# Altium PCB PowerB.PcbDoc
Units mm, origin at the board's own origin, x right, y up, seen from the top; angles counter-clockwise.
Board outline 84.7 x 77.5 mm, 4 copper layers (Top Layer, Internal Plane 1, Internal Plane 2, Bottom Layer); 23 components, 16 nets, 87 pads, 1 vias.
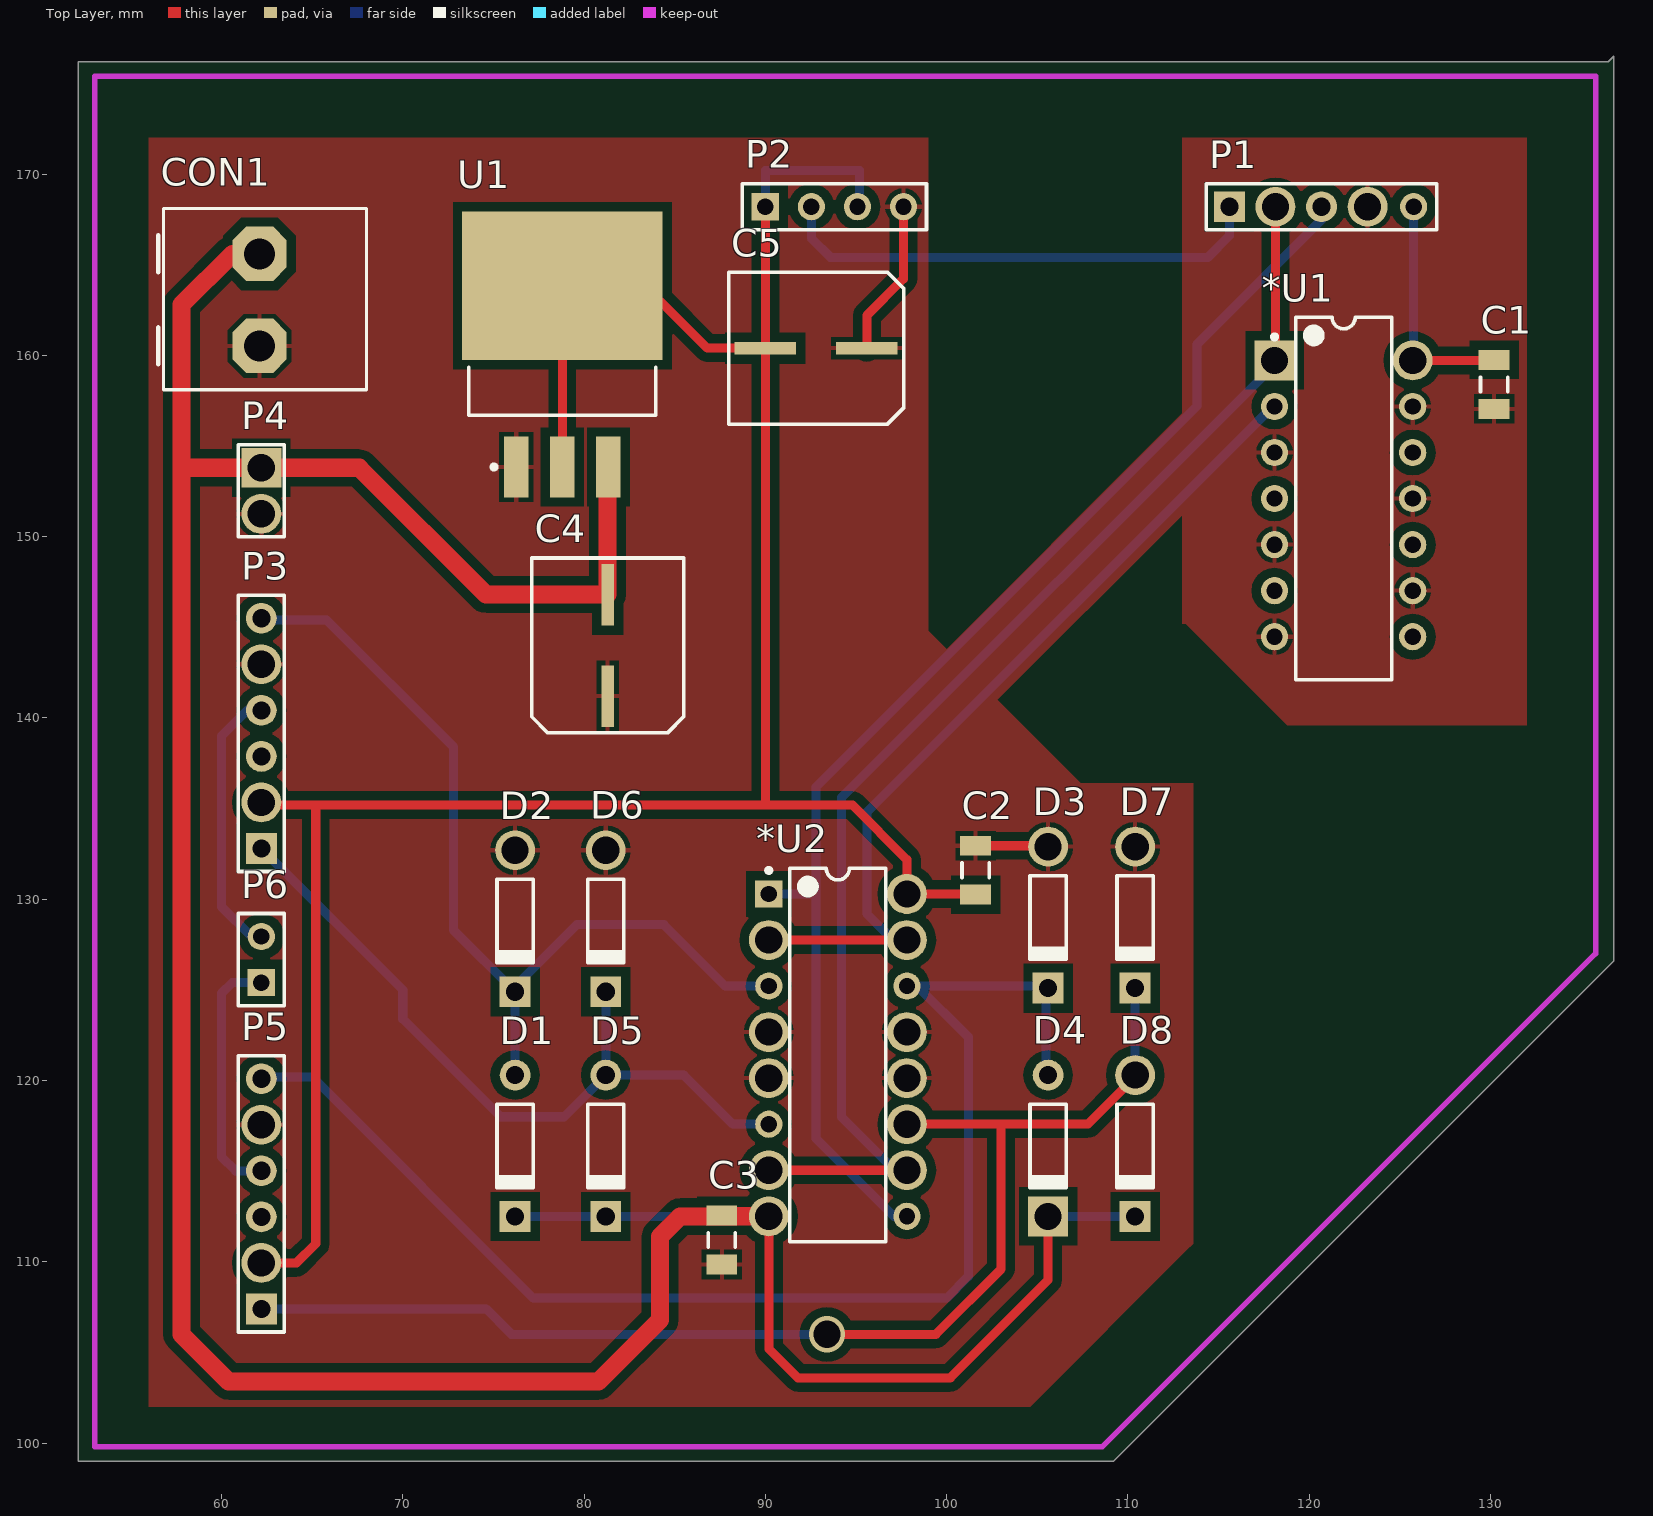
[diagram p0: Top Layer view]
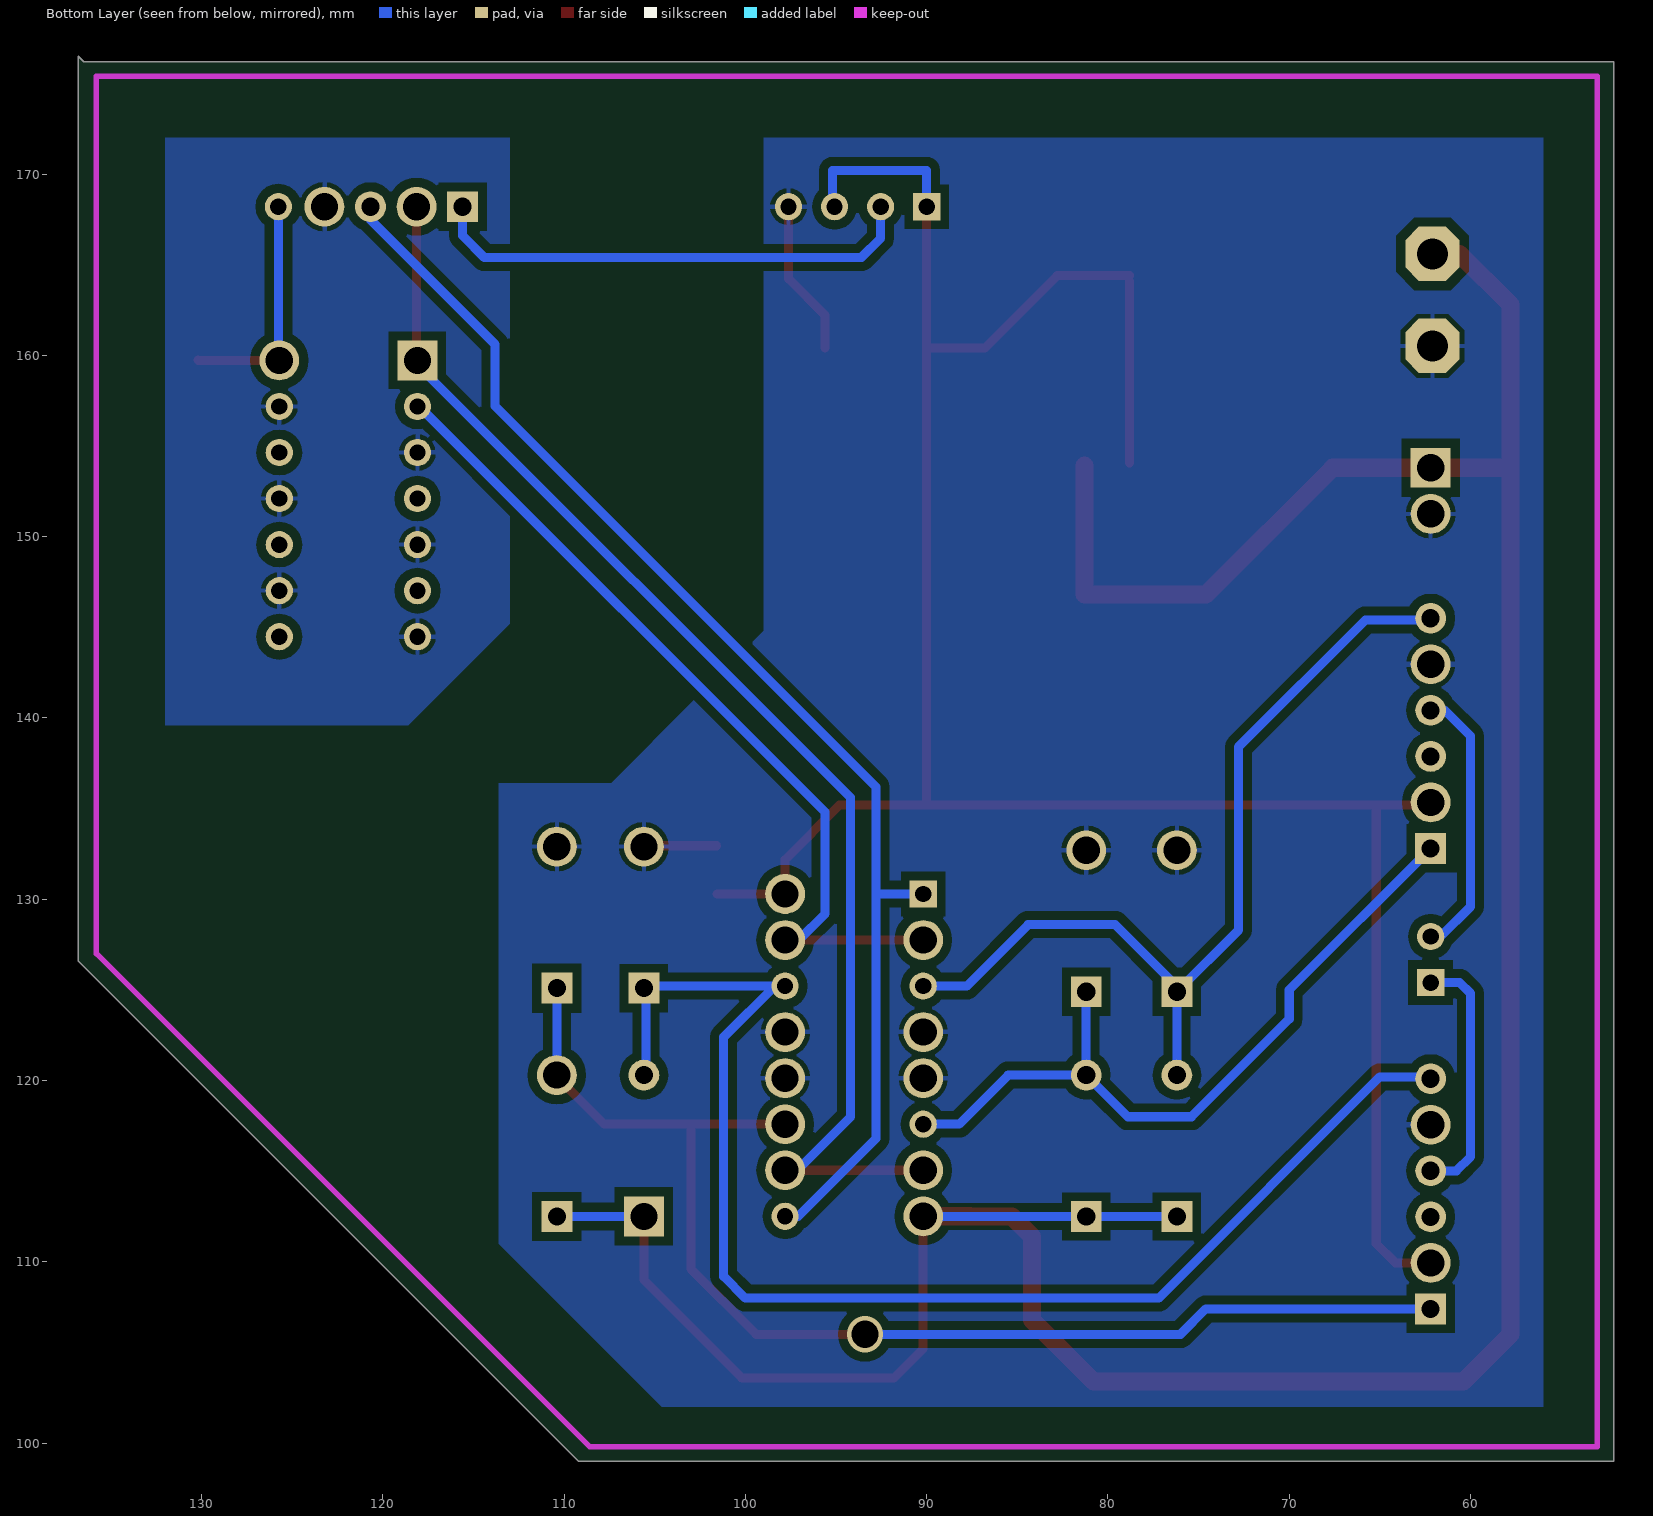
[diagram p1: Bottom Layer view, seen from below]
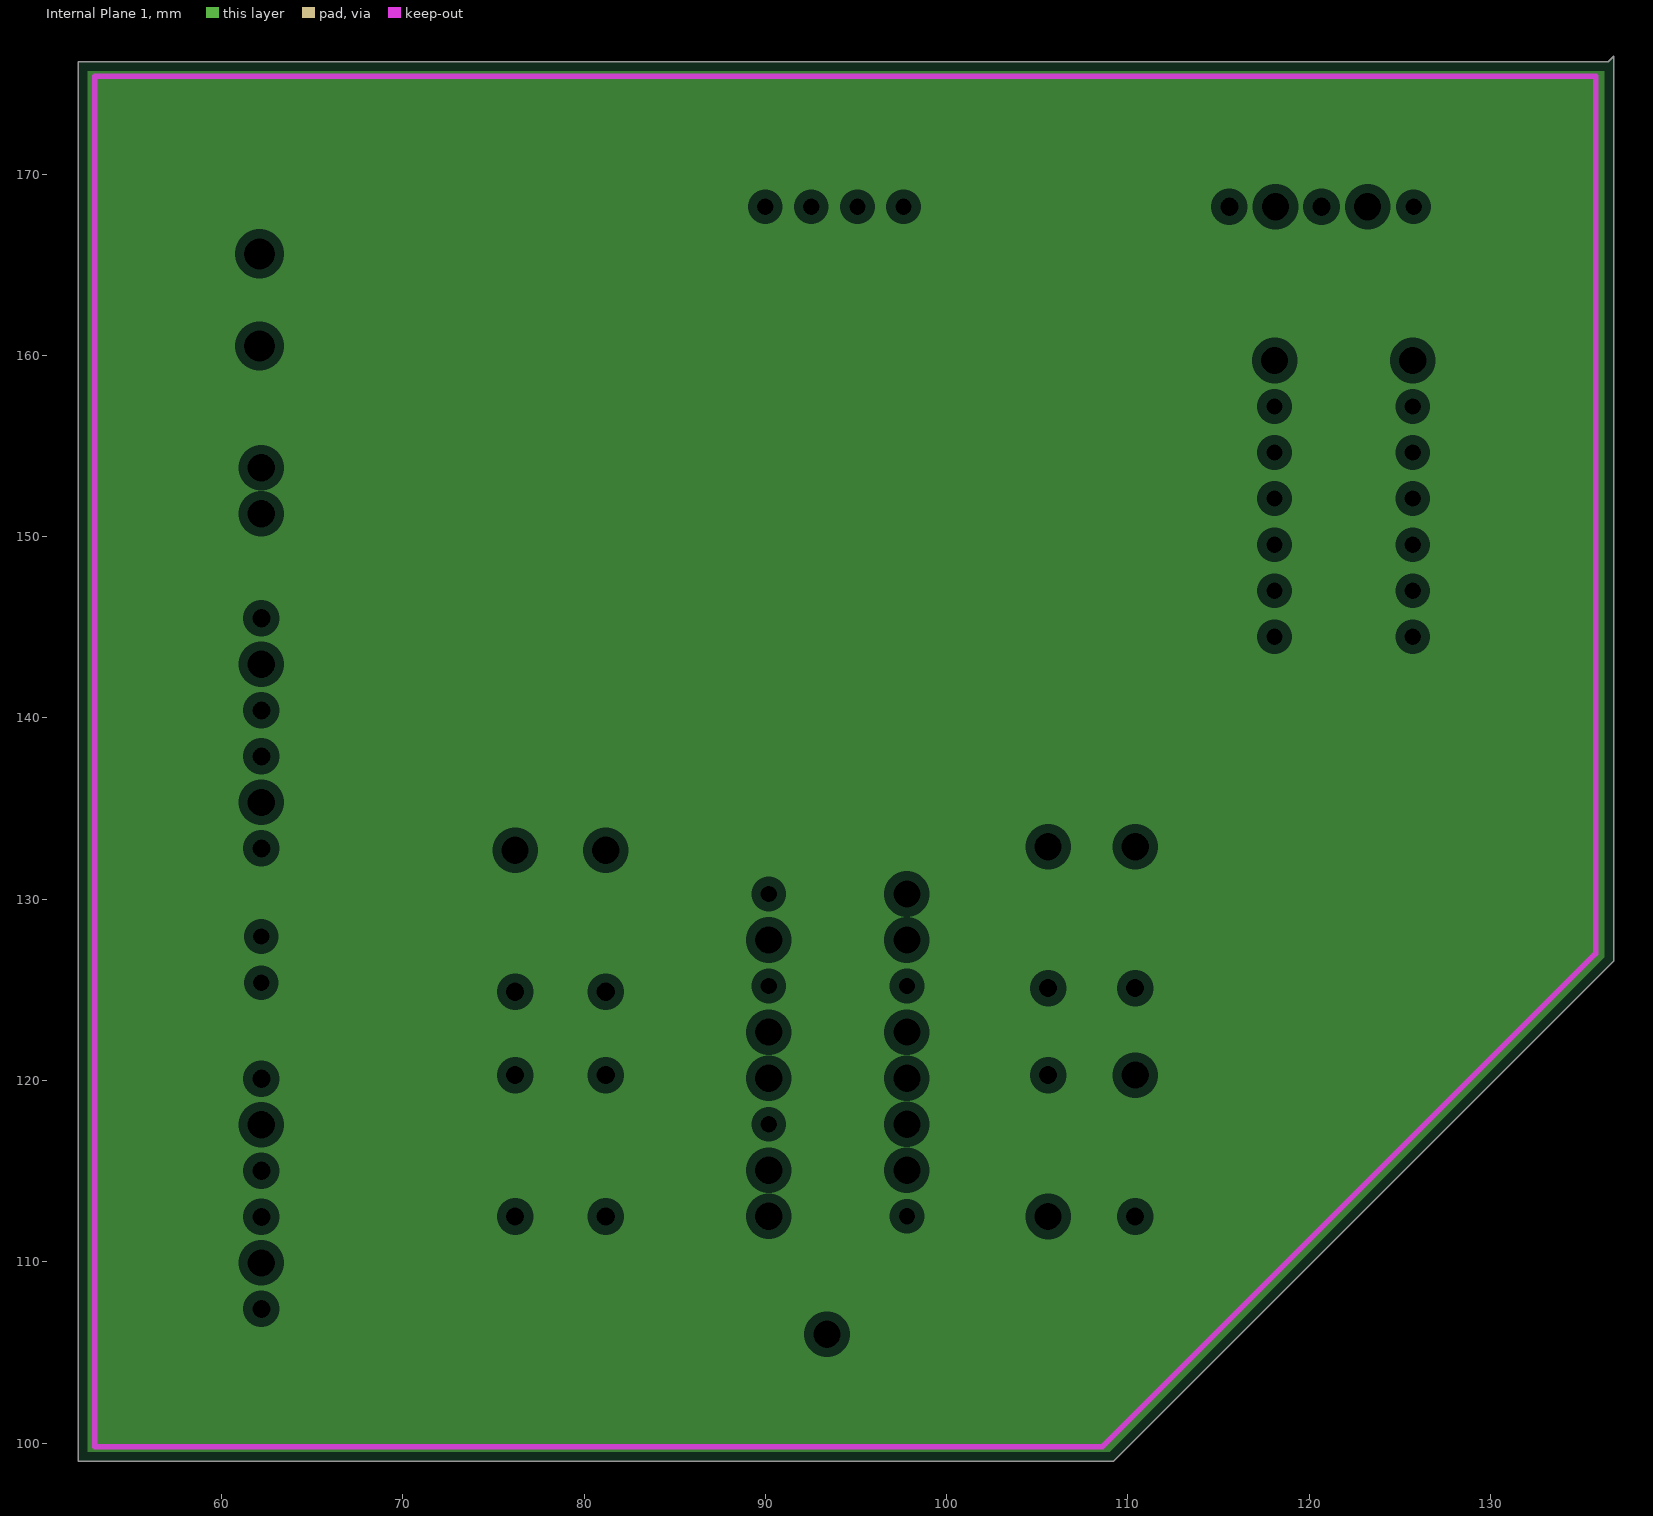
[diagram p2: Internal Plane 1, clearances drawn from the general rule]
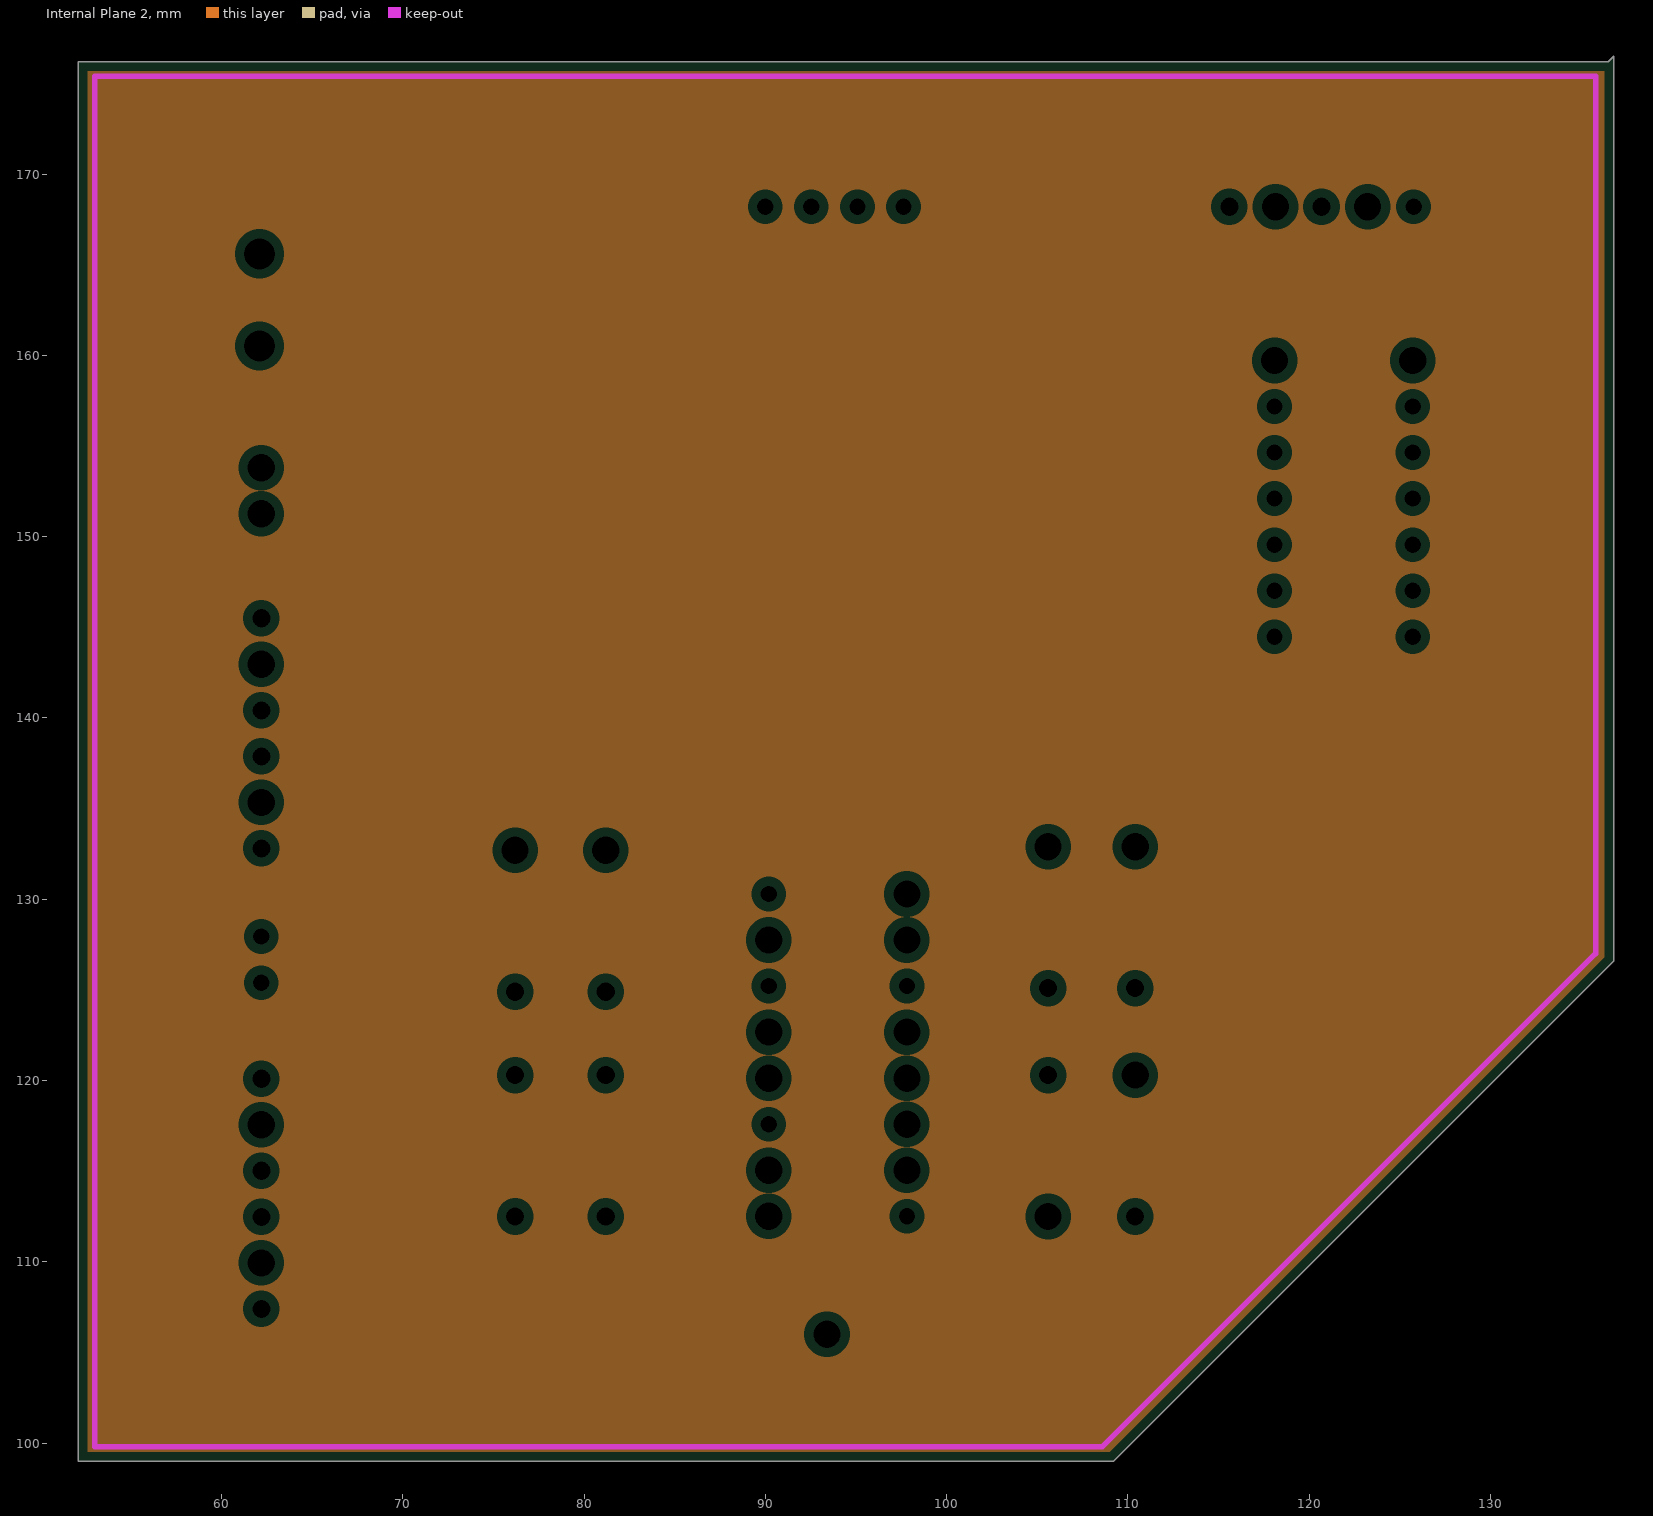
[diagram p3: Internal Plane 2, clearances drawn from the general rule]

## Layer stack, top to bottom
Top Layer: signal copper 0.0356
Dielectric: dielectric 0.32, FR-4, Dk 4.8
Internal Plane 1: plane copper 0.0356
Dielectric: dielectric 0.32, FR-4, Dk 4.8
Internal Plane 2: plane copper 0.0356
Dielectric: dielectric 0.32, FR-4, Dk 4.8
Bottom Layer: signal copper 0.0356

## Board outline
52.1,176.2 52.1,99 109.2,99 136.8,126.6 136.8,176.5 136.5,176.2

## Design rules (kind name [scope] priority, off if disabled: settings)
Clearance [All] p1: gap=0.5
PlaneClearance [All] p1: clearance=0.508
PlaneConnect [All] p1: planeconnectstyle=Relief reliefexpansion=0.508 reliefentries=4 reliefconductorwidth=0.254 reliefairgap=0.254
PolygonConnect [All] p1: connectstyle=Relief reliefconductorwidth=0.254 reliefentries=4 polygonreliefangle="90 Angle" airgapwidth=0.254
RoutingVias [All] p1: holewidth=1.5 width=2 viastyle="Through Hole" minholewidth=0.711 minwidth=1.27 maxholewidth=0.711 maxwidth=1.27
SolderMaskExpansion [All] p1: expansion=0.102
Width [All] p1: maxlimit=1 minlimit=0.5 preferedwidth=0.5
26 further rules are at their usual default settings.

## Components (designator, comment, footprint, x,y, rotation, side; value= is the part's Value field where it differs from the comment)
*U1 "SN74HC04" DIP14 121.9,152.1 r0 top
*U2 "L293" DIP16 94,121.4 r0 top
C1 "Cap Semi" C1206 130.2,158.4 r270 top
C2 "Cap Semi" C1206 101.6,131.6 r270 top
C3 "Cap Semi" C1206 87.6,111.2 r90 top
C4 "Cap2" 100EFK 81.3,144 r270 top
C5 "Cap2" 100EFK 92.8,160.4 r0 top
CON1 "1715721" 1715721 62.1,165.6 r270 top
D1 "Diode 1N4149" DO-35A#1 76.2,116.4 r270 top
D2 "Diode 1N4149" DO-35A#2 76.2,128.8 r270 top
D3 "Diode 1N4149" DO-35A#2 105.6,129 r270 top
D4 "Diode 1N4149" DO-35A#3 105.6,116.4 r270 top
D5 "Diode 1N4149" DO-35A#1 81.2,116.4 r270 top
D6 "Diode 1N4149" DO-35A#2 81.2,128.8 r270 top
D7 "Diode 1N4149" DO-35A#2 110.4,129 r270 top
D8 "Diode 1N4149" DO-35A#2 110.4,116.4 r270 top
P1 "Header 5" HDR1X5 115.6,168.2 r0 top
P2 "Header 4" HDR1X4 90,168.2 r0 top
P3 "Header 6" HDR1X6 62.2,132.8 r90 top
P4 "Header 2" HDR1X2#1 62.2,153.8 r270 top
P5 "Header 6" HDR1X6 62.2,107.4 r90 top
P6 "Header 2" HDR1X2#2 62.2,125.4 r90 top
U1 "LM1086" DPAK254 78.8,162.2 r0 top

## Footprints (in the part's own frame and the unit in brackets; to place one, negate y for a bottom-side part, rotate by r counter-clockwise, add the part's x,y. Pads: shape width x height; smd on the part's side, far side on the other; paste and mask are expansions set on the pad)
100EFK [mm]
  rect 3.4x0.7 smd: 1(-2.8,0) 2(2.8,0)
  silkscreen extent -4.83,-4.19 4.83,4.19
1715721 [mm] "CONN TERM BLOCK 2POS 5MM PCB 18mm height"
  oct 3x3 hole 1.7: 1(0,0) 2(5.08,0)
  silkscreen extent -2.5,-5.59 7.5,5.9, body extent -3,-5.36 7.57,5.84, height 18
C1206 [mm] "Chip Capacitor, Body 3.2x1.6mm, IPC High Density"
  rect 1.1x1.7 smd: 1(-1.35,0) 2(1.35,0)
  silkscreen extent -0.4,-0.75 0.4,0.75, body extent -1.7,-0.9 1.7,0.9, height 1.3
DIP14 [mm] "DIP, 14-Leads, Row Spacing 7.62mm, Pitch 2.54mm, Body 19.6x6.3mm"
  rect 2.2x2.2 hole 1.5: 1(-3.81,7.62)
  round 1.5 hole 0.9: 2(-3.81,5.08) 3(-3.81,2.54) 4(-3.81,0) 5(-3.81,-2.54) 6(-3.81,-5.08) 7(-3.81,-7.62) 8(3.81,-7.62) 9(3.81,-5.08) 10(3.81,-2.54) 11(3.81,0) 12(3.81,2.54) 13(3.81,5.08)
  round 2.2 hole 1.5: 14(3.81,7.62)
  silkscreen extent -3.93,-10 2.65,10, body extent -3.3,-10 3.3,10, height 4.8
DIP16 [mm] "DIP, 16-Leads, Row Spacing 7.62mm, Pitch 2.54mm, Body 19.31x6.35mm"
  rect 1.5x1.5 hole 0.9: 1(-3.81,8.89)
  round 2.2 hole 1.5: 2(-3.81,6.35) 4(-3.81,1.27) 5(-3.81,-1.27) 7(-3.81,-6.35) 8(-3.81,-8.89) 10(3.81,-6.35) 11(3.81,-3.81) 12(3.81,-1.27) 13(3.81,1.27) 15(3.81,6.35) 16(3.81,8.89)
  round 1.5 hole 0.9: 3(-3.81,3.81) 6(-3.81,-3.81) 9(3.81,-8.89) 14(3.81,3.81)
  silkscreen extent -3.93,-10.3 2.65,10.31, body extent -3.6,-10.28 3.6,10.28, height 4.42
DO-35A#1 [mm] "Diode, Axial; Body 4.6 x 1.9 mm (LxDia. max), Lead Dia. 0.53 mm (max)"
  round 1.7 hole 1: 1(-3.9,0)
  rect 1.7x1.7 hole 1: 2(3.9,0)
  silkscreen extent -2.3,-1 2.4,1
DO-35A#2 [mm] "Diode, Axial; Body 4.6 x 1.9 mm (LxDia. max), Lead Dia. 0.53 mm (max)"
  round 2.2 hole 1.5: 1(-3.9,0)
  rect 1.7x1.7 hole 1: 2(3.9,0)
  silkscreen extent -2.3,-1 2.4,1
DO-35A#3 [mm] "Diode, Axial; Body 4.6 x 1.9 mm (LxDia. max), Lead Dia. 0.53 mm (max)"
  round 1.7 hole 1: 1(-3.9,0)
  rect 2.2x2.2 hole 1.5: 2(3.9,0)
  silkscreen extent -2.3,-1 2.4,1
DPAK254 [mm] "D2-PAK, 4-Pads, Body 7.48x8.48mm (max), IPC Low Density"
  rect 1.35x3.35 smd: 1(-2.54,-8.359) 2(0,-8.359) 3(2.54,-8.359)
  rect 11.05x8.2 smd: 4(0,1.641)
  silkscreen extent -5.15,-8.48 5.15,-2.86, body extent -5.13,-5.51 5.13,3.24, height 4.57
HDR1X2#1 [mm] "Connector; Header; 2 Position"
  rect 2.2x2.2 hole 1.5: 1(0,0)
  round 2.2 hole 1.5: 2(2.54,0)
  silkscreen extent -1.27,-1.27 3.81,1.27
HDR1X2#2 [mm] "Connector; Header; 2 Position"
  rect 1.5x1.5 hole 0.9: 1(0,0)
  round 1.5 hole 0.9: 2(2.54,0)
  silkscreen extent -1.27,-1.27 3.81,1.27
HDR1X4 [mm] "Connector; Header; 4 Position"
  rect 1.5x1.5 hole 0.9: 1(0,0)
  round 1.5 hole 0.9: 2(2.54,0) 3(5.08,0) 4(7.62,0)
  silkscreen extent -1.27,-1.27 8.89,1.27
HDR1X5 [mm] "Connector; Header; 5 Position"
  rect 1.7x1.7 hole 1: 1(0,0)
  round 2.2 hole 1.5: 2(2.54,0) 4(7.62,0)
  round 1.7 hole 1: 3(5.08,0)
  round 1.5 hole 0.9: 5(10.16,0)
  silkscreen extent -1.27,-1.27 11.43,1.27
HDR1X6 [mm] "Connector; Header; 6 Position"
  rect 1.7x1.7 hole 1: 1(0,0)
  round 2.2 hole 1.5: 2(2.54,0) 5(10.16,0)
  round 1.7 hole 1: 3(5.08,0) 4(7.62,0) 6(12.7,0)
  silkscreen extent -1.27,-1.27 13.97,1.27

## Part data
C1 C2 C3: "Capacitor (Semiconductor SIM Model)"
C4 C5: "Capacitor"
CON1: "Conn Term (screw) Block 5mm 2Pos 18mm height"
D1 D2 D3 D4 D5 D6 D7 D8: library part "Diode 1N4007", "1 Amp General Purpose Rectifier"
P1: "Header, 5-Pin"
P2: "Header, 4-Pin"
P3 P5: "Header, 6-Pin"
P4 P6: "Header, 2-Pin"

## Via types
v1: diameter 2, hole 1.5, Top Layer to Bottom Layer, 1 vias

## Nets (pads, with @x,y where several pads share a name; then routed paths per layer and width w, separated by ;. In a path a pad name is that pad's centre, name@x,y a point inside that pad or via, vN(x,y) a via of type N, cw(c..) or ccw(c..) an arc to the next point about the centre after c; other vN are vias at no path point)
D\I\R\: *U1.2 *U2.2 *U2.15 | length 47.8
  Top Layer w0.5: *U2.2 *U2.15
  Bottom Layer w0.5: *U2.15 97.05,127.75 95.6,129.2 95.6,134.8 117.98,157.18 *U1.2
DIR: *U1.1 *U2.7 *U2.10 P1.2 | length 72.5
  Top Layer w0.5: *U2.7 *U2.10 ; *U1.1@118.14,159.77 P1.2
  Bottom Layer w0.5: *U2.10 97.15,115.05 94.2,118 94.2,135.6 118.09,159.49 *U1.1
GND: *U1.3 *U1.5 *U1.7 *U1.9 *U1.11 *U1.13 *U2.4 *U2.5 *U2.12 *U2.13 C1.2 C2.1 C3.1 C4.2 C5.2 CON1.2 D2.1 D3.1 D6.1 D7.1 P1.4 P2.4 P3.5 P4.2 P5.5 U1.1 | length 12.6
  Top Layer w0.5: C5.2 95.6,162.2 97.62,164.22 P2.4 ; C2.1 D3.1@105.55,132.95
LEFTM_N: *U2.6 D5.1 D6.2 P3.1 | length 41.7
  Bottom Layer w0.5: P3.1 70,125 70,123.4 75.4,118 78.9,118 D5.1 ; D6.2 D5.1@81.2,120.3 ; *U2.6 88.21,117.59 85.5,120.3 D5.1
LEFTM_P: *U2.3 D1.1 D2.2 P3.6 | length 50.6
  Top Layer w0.5: D2.2 D2.2@76.2,125.4
  Bottom Layer w0.5: P3.6@62.2,145.4 65.8,145.4 72.8,138.4 72.8,128.3 D2.2 ; D1.1 D2.2 ; *U2.3 87.79,125.21 84.4,128.6 79.6,128.6 76.2,125.2 D2.2
LENCA: P3.4 P6.2 | length 15.1
  Bottom Layer w0.5: P6.2 61.66,127.94 60,129.6 60,139 61.42,140.42 P3.4
LENCB: P3.3
PWM_M: *U2.1 *U2.9 P1.3 | length 72.4
  Bottom Layer w0.5: *U2.1 92.71,130.29 92.8,130.2 ; *U2.9 97.09,112.51 92.8,116.8 92.8,130.2 ; P1.3 120.68,167.48 113.8,160.6 113.8,157.2 92.8,136.2 92.8,130.2
PWM_S: P1.1 P2.2 | length 27.3
  Bottom Layer w0.5: P2.2 92.54,166.46 93.6,165.4 114.4,165.4 115.6,166.6 P1.1
RENCA: P5.4 P6.1 | length 14
  Bottom Layer w0.5: P5.4 60.78,115.02 60,115.8 60,124.8 60.6,125.4 P6.1
RENCB: P5.3
RIGHTM_N: *U2.11 D7.2 D8.1 P5.1 | length 69.6
  Top Layer w0.5: v1@93.4,106.2 93.6,106 99.4,106 103,109.6 103,117.59 ; *U2.11 107.79,117.59 110.4,120.2 D8.1
  Bottom Layer w0.5: P5.1 74.6,107.4 76,106 93.2,106 v1@93.4,106.2 ; D8.1 D7.2
  other v1: 93.4,106
RIGHTM_P: *U2.14 D3.2 D4.1 P5.6 | length 74.8
  Bottom Layer w0.5: P5.6 62.3,120.2 65,120.2 77.2,108 100,108 101.2,109.2 101.2,122.4 98.39,125.21 *U2.14 105.49,125.21 D4.1@105.49,120.41
VCC3.3: *U1.14 C1.1 P1.5 | length 13
  Top Layer w0.5: *U1.14@125.76,159.72 130.17,159.72 C1.1
  Bottom Layer w0.5: *U1.14 125.76,159.77 P1.5
VCC5: *U2.16 C2.2 C5.1 P2.1 P2.3 P3.2 P5.2 U1.2 U1.4 | length 135.3
  Top Layer w0.5: P3.2@62,135.14 62.06,135.2 65.2,135.2 ; P5.2 64.14,109.94 65.2,111 65.2,135.2 ; U1.2@78.8,154.073 U1.4@78.8,164.073 ; U1.4@78.8,164.4 82.8,164.4 86.8,160.4 C5.1 ; P2.1@90,168 C5.1 ; C2.2@101.56,130.29 *U2.16 97.81,132.19 94.8,135.2 90,135.2 ; 65.2,135.2 90,135.2 ; 90,135.2 C5.1
  Bottom Layer w0.5: P2.1 90,170.2 95.2,170.2 95.2,168.32 P2.3
VCC7.2: *U2.8 C3.2 C4.1 CON1.1 D1.2 D4.2 D5.2 D8.2 P4.1 U1.3 | length 182.9
  Top Layer w0.5: 85.3,112.5 85.5,112.5 ; *U2.8 90.2,112.5 90.2,105.2 91.8,103.6 100.2,103.6 105.6,109 D4.2
  Top Layer w1: 58.4,153.8 P4.1 67.6,153.8 74.6,146.8 C4.1 U1.3@81.3,153.91 ; CON1.1 60.6,165.6 57.8,162.8 57.8,106 60.4,103.4 80.8,103.4 84.2,106.8 84.2,111.4 85.3,112.5 ; 85.5,112.5 C3.2@87.55,112.5 ; C3.2@87.6,112.51 *U2.8
  Bottom Layer w0.5: D1.2 D5.2@81.2,112.5 ; D5.2@81.21,112.51 *U2.8 ; D4.2 D8.2
pads on no net: *U1.4 *U1.6 *U1.8 *U1.10 *U1.12

## Polygon pours and split planes (outlines as drawn)
GND on Top Layer "Top Layer-No Net" (solid, pour order 11): 113,172 113,145.2 113.2,145.2 118.8,139.6 132,139.6 132,172
GND on Top Layer "Top Layer-No Net" (solid, pour order 9): 56,172 56,102 104.6,102 113.2,110.6 113.6,111 113.6,136.4 107.4,136.4 99.2,144.6 99,144.8 99,172
GND on Top Layer "Top Layer-No Net" (solid, pour order 15): 114,157.8 97.6,141.4 100.4,138.6 115,153.2 115,153.4
GND on Bottom Layer "Top Layer-No Net" (solid, pour order 15): 113,172 113,145.2 118.6,139.6 118.8,139.6 132,139.6 132,172 113,172
GND on Bottom Layer "Top Layer-No Net" (solid, pour order 13): 56,172 56,102 104.6,102 113.6,111 113.6,136.4 107.4,136.4 99,144.8 99,172
no net on Internal Plane 1 (split plane): 136.29,126.811 108.989,99.51 52.61,99.51 52.61,175.69 136.29,175.69
no net on Internal Plane 2 (split plane): 136.29,126.811 108.989,99.51 52.61,99.51 52.61,175.69 136.29,175.69

## Keep-outs
Keep-Out Layer:
  lines w0.3: 53,99.8 108.6,99.8 135.8,127 135.8,175.4 53,175.4 53,99.8

## Silkscreen, mask and mechanical layers (free items; w line width, h text height)
Drill Drawing:
  text ".LEGEND" at 33.528,74.168 h1.52
  text "Drill Drawing." at 33.528,71.628 h1.52

## Dimensions
53,99.8 to 53,175.4 on Mechanical 1
52.1,77.5 to 176.5,77.5 on Mechanical 1